# Altium PCB dongle.pcbdoc
Units mil, origin at the board's own origin, x right, y up, seen from the top; angles counter-clockwise.
Board outline 653.54 x 381.1 mil, 4 copper layers (Top Layer, Inner1, Inner2, Bottom Layer), stack 22.834 mil thick; 26 components, 21 nets, 115 pads, 44 vias.
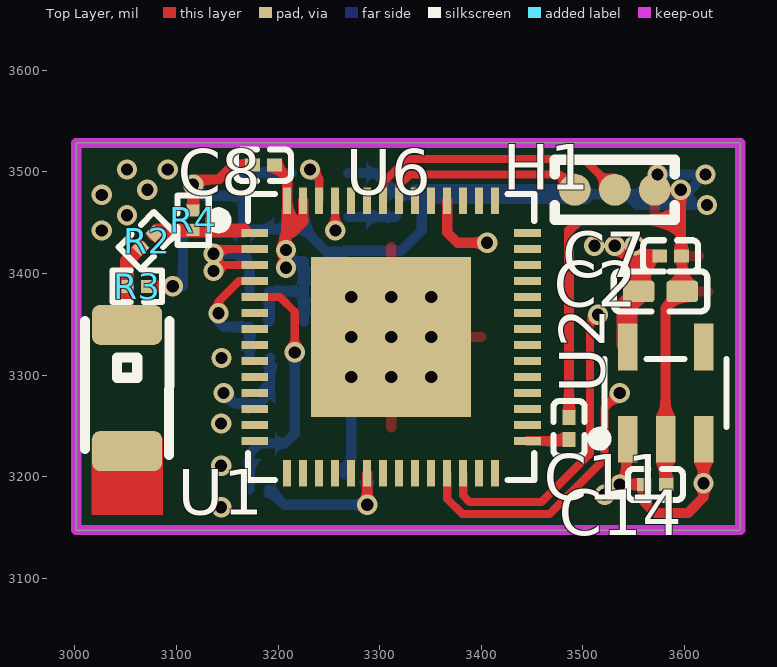
[diagram p0: Top Layer view]
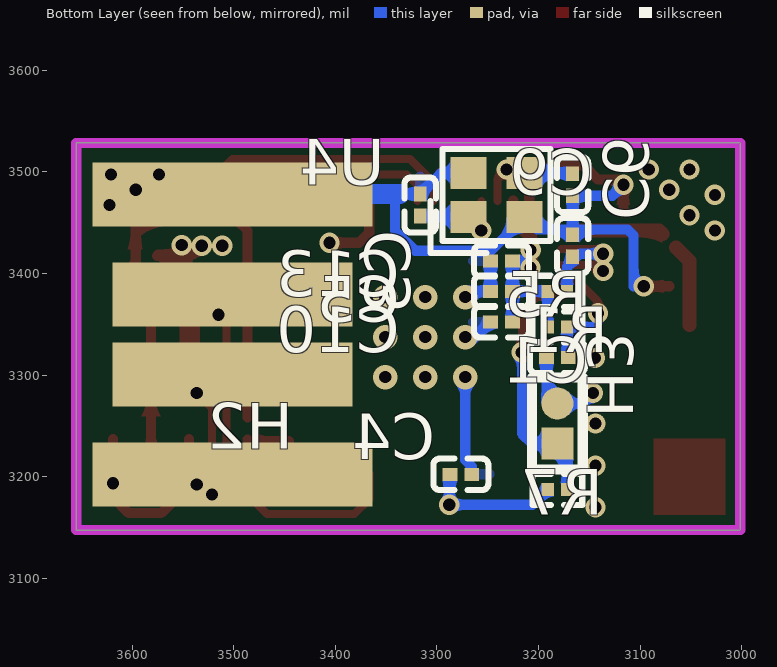
[diagram p1: Bottom Layer view, seen from below]
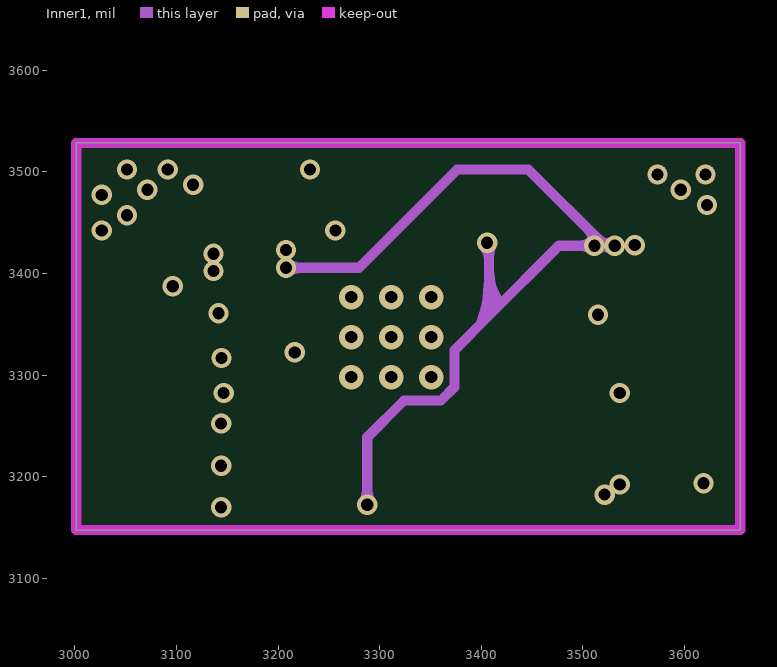
[diagram p2: Inner1]
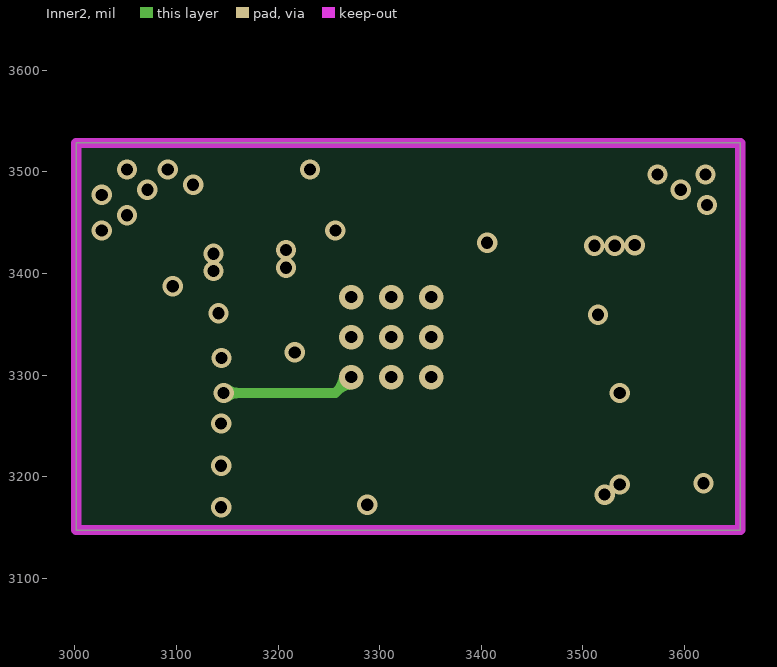
[diagram p3: Inner2]

## Layer stack, top to bottom
Top Solder Mask Layer: solder mask 0.394, Dk 0
Top Layer: signal copper 1.378
Dielectric1: surface 5.774, 7628 RC49% 8.6mil, Dk 0
Inner1: signal copper 1.378
Dielectric2: surface 5.774, 1.1mm H/HOZ Copper, Dk 0
Inner2: signal copper 1.378
Dielectric3: surface 5.774, 7628 RC49% 8.6mil, Dk 0
Bottom Layer: signal copper 1.378
Bottom Solder Mask Layer: solder mask 0.394, Dk 0

## Board outline
3001.38,3528.46 3654.92,3528.46 3654.92,3147.36 3001.38,3147.36

## Design rules (kind name [scope] priority, off if disabled: settings)
BoardOutlineClearance copperThickness1oz [All] p0: genericclearance=10 ignorepadtopadclearanceinfootprint=FALSE except(0: Arc-SplitContinuation Track-SplitContinuation SMDPad-SplitContinuation THPad-SplitContinuation Via-SplitContinuation Fill-SplitContinuation Poly-SplitContinuation Region-SplitContinuation Text-SplitContinuation)
BoardOutlineClearance copperThickness2oz [All] p0: genericclearance=10 ignorepadtopadclearanceinfootprint=FALSE except(0: Arc-SplitContinuation Track-SplitContinuation SMDPad-SplitContinuation THPad-SplitContinuation Via-SplitContinuation Fill-SplitContinuation Poly-SplitContinuation Region-SplitContinuation Text-SplitContinuation)
BoardOutlineClearance otherClearance [All] p0: genericclearance=10 ignorepadtopadclearanceinfootprint=FALSE except(0: Arc-SplitContinuation Track-SplitContinuation SMDPad-SplitContinuation THPad-SplitContinuation Via-SplitContinuation Fill-SplitContinuation Poly-SplitContinuation Region-SplitContinuation Text-SplitContinuation)
Clearance copperThickness1oz [All] p1: gap=7 ignorepadtopadclearanceinfootprint=FALSE
Clearance copperThickness2oz [All] p1: gap=7 ignorepadtopadclearanceinfootprint=FALSE
Clearance otherClearance [All] p1: gap=7 ignorepadtopadclearanceinfootprint=FALSE
DiffPairsRouting differentialPair [All] p1: maxuncoupledlength=10 minlimit=6 maxlimit=Infinity mostfreqgap=6 toplayer_minwidth=5 toplayer_prefwidth=10 toplayer_maxwidth=100 bottomlayer_minwidth=5 bottomlayer_prefwidth=10 bottomlayer_maxwidth=100 midlayer1_minwidth=5 midlayer1_prefwidth=10 midlayer1_maxwidth=100 midlayer2_minwidth=5 midlayer2_prefwidth=10 midlayer2_maxwidth=100
PasteMaskExpansion pasteMaskExpansion [All] p1: expansion=0
PlaneConnect innerPlane [All] p1: planeconnectstyle=Relief reliefexpansion=20 reliefentries=4 reliefconductorwidth=10 reliefairgap=10
PolygonConnect copperRegion [All] p1: connectstyle=Relief reliefentries=4 reliefconductorwidth=10 polygonreliefangle="90 Angle" airgapwidth=10
RoutingVias viaSize [All] p1: viastyle="Through Hole" holewidth=12.0078 minholewidth=11.811 maxholewidth=248.0314 width=12.0078 minwidth=11.811 maxwidth=248.0314
SolderMaskExpansion solderMaskExpansion [All] p1: useseparateexpansions=TRUE expansion=2 expansionbottom=2
Width copperThickness1oz [All] p1: maxlimit=100 minlimit=5 preferedwidth=10
Width copperThickness2oz [All] p1: maxlimit=100 minlimit=8 preferedwidth=10

## Components (designator, comment, footprint, x,y, rotation, side; value= is the part's Value field where it differs from the comment)
C1 "" C0201 3181.38,3317.36 r180 bottom
C2 "" C0402 3576.38,3382.36 r180 top
C3 "" C0201 3316.38,3467.36 r90 bottom
C4 "" C0201 3276.38,3202.36 r0 bottom
C5 "" C0201 3236.38,3382.36 r180 bottom
C6 "" C0201 3166.38,3427.36 r270 bottom
C7 "" C0201 3586.38,3417.36 r180 top
C8 "" C0201 3185.58,3506.56 r0 top
C9 "" C0201 3166.38,3487.36 r90 bottom
C10 "" C0201 3236.38,3352.36 r180 bottom
C11 "" C0201 3486.38,3247.36 r90 top
C13 "" C0201 3236.38,3412.36 r180 bottom
C14 "" C0201 3571.38,3192.36 r180 top
H1 "" HDR-TH_3P-P1.00-V-M-3 3531.38,3482.36 r0 top
H2 "" HDR-TH_4P-P2.54-V-M 3501.38,3202.36 r90 bottom
H3 "" HDR-TH_2P-P1.00-V-M 3181.38,3252.36 r90 bottom
R1 "" R0201 3181.38,3347.36 r0 bottom
R2 "" R0201 3071.38,3432.36 r225 top
R3 "" R0201 3061.38,3387.36 r180 top
R4 "" R0201 3116.38,3452.36 r270 top
R5 "" R0201 3181.38,3382.36 r0 bottom
R7 "" R0201 3181.38,3187.36 r180 bottom
U1 "" ANT-SMD_L3.2-W1.6 3051.38,3287.36 r270 top
U2 "" SOT-23-5_L3.0-W1.7-P0.95-LS2.8-BL 3581.38,3282.36 r0 top
U4 "" CRYSTAL-SMD_4P-L2.0-W1.6-BL 3241.38,3477.36 r180 bottom
U6 "" QFN-56_L7.0-W7.0-P0.40-TL-EP4.0 3311.38,3337.36 r0 top

## Footprints (in the part's own frame and the unit in brackets; to place one, negate y for a bottom-side part, rotate by r counter-clockwise, add the part's x,y. Pads: shape width x height; smd on the part's side, far side on the other; paste and mask are expansions set on the pad)
ANT-SMD_L3.2-W1.6 [mil]
  rrect40% 39.4x68.9 smd: 1(-62.1,0) 2(62.1,0)
  Top Layer region: 50,35 125,35 125,-35 50,-35
  silkscreen extent -66,-41 66,42
C0201 [mil]
  rect 14.51x12.76 smd: 1(-10.8,0) 2(10.8,0)
  silkscreen extent -27,-15 27,15
C0402 [mm]
  rrect30% 0.79x0.54 smd: 1(-0.545,0) 2(0.545,0)
  silkscreen extent -1.17,-0.5 1.17,0.5
CRYSTAL-SMD_4P-L2.0-W1.6-BL [mm]
  rect 0.9x0.8 smd: 1(-0.7,-0.55) 2(0.7,-0.55) 3(0.7,0.55) 4(-0.7,0.55)
  silkscreen extent -1.65,-1.45 1.35,1.15
HDR-TH_2P-P1.00-V-M [mm]
  rect 0.8x0.8 smd: 1(-0.5,0)
  round 0.8 smd: 2(0.5,0)
  silkscreen extent -1.15,-0.64 1.15,0.64
HDR-TH_3P-P1.00-V-M-3 [mm]
  round 0.8 smd: 1(-1,0) 2(0,0) 3(1,0)
  silkscreen extent -1.5,-0.75 1.5,0.75
HDR-TH_4P-P2.54-V-M [mm]
  rect 1.6x7 smd: 1(0,0) 4(7,0)
  rect 1.6x6 smd: 2(2.5,0) 3(4.5,0)
QFN-56_L7.0-W7.0-P0.40-TL-EP4.0 [mm]
  rect 0.665x0.2 smd: 1(-3.408,2.6) 2(-3.408,2.2) 3(-3.408,1.8) 4(-3.408,1.4) 5(-3.408,1) 6(-3.408,0.6) 7(-3.408,0.2) 8(-3.408,-0.2) 9(-3.408,-0.6) 10(-3.408,-1) 11(-3.408,-1.4) 12(-3.408,-1.8) 13(-3.408,-2.2) 14(-3.408,-2.6) 29(3.408,-2.6) 30(3.408,-2.2) 31(3.408,-1.8) 32(3.408,-1.4) 33(3.408,-1) 34(3.408,-0.6) 35(3.408,-0.2) 36(3.408,0.2) 37(3.408,0.6) 38(3.408,1) 39(3.408,1.4) 40(3.408,1.8) 41(3.408,2.2) 42(3.408,2.6)
  rect 0.2x0.665 smd: 15(-2.6,-3.408) 16(-2.2,-3.408) 17(-1.8,-3.408) 18(-1.4,-3.408) 19(-1,-3.408) 20(-0.6,-3.408) 21(-0.2,-3.408) 22(0.2,-3.408) 23(0.6,-3.408) 24(1,-3.408) 25(1.4,-3.408) 26(1.8,-3.408) 27(2.2,-3.408) 28(2.6,-3.408) 43(2.6,3.408) 44(2.2,3.408) 45(1.8,3.408) 46(1.4,3.408) 47(1,3.408) 48(0.6,3.408) 49(0.2,3.408) 50(-0.2,3.408) 51(-0.6,3.408) 52(-1,3.408) 53(-1.4,3.408) 54(-1.8,3.408) 55(-2.2,3.408) 56(-2.6,3.408)
  rect 4x4 smd: 57(0,0)
  silkscreen extent -4.64,-3.58 3.58,3.58
R0201 [mil]
  rect 11.93x12.76 smd: 1(-9.51,0) 2(9.51,0)
  silkscreen extent -24,-15 24,15
SOT-23-5_L3.0-W1.7-P0.95-LS2.8-BL [mm]
  rect 0.49x1.157 smd: 1(-0.95,-1.154) 2(0,-1.154) 3(0.95,-1.154)
  rect 0.49x1.175 smd: 4(0.95,1.154) 5(-0.95,1.154)
  silkscreen extent -1.8,-1.29 1.53,0.85

## Via types
v1: diameter 20, hole 12.01, Top Layer to Bottom Layer, 35 vias
v2: diameter 24, hole 12, Top Layer to Bottom Layer, 9 vias

## Nets (pads, with @x,y where several pads share a name; then routed paths per layer and width w, separated by ;. In a path a pad name is that pad's centre, name@x,y a point inside that pad or via, vN(x,y) a via of type N, cw(c..) or ccw(c..) an arc to the next point about the centre after c; other vN are vias at no path point)
$1N1: R2.2 R3.2 U1.1 | length 81.7
  Top Layer w13.8: U1.1 3051.38,3412.36 R2.2
$1N4: R2.1 R4.2 U6.1 | length 89.6
  Top Layer w13.8: R2.1 3081.38,3442.36 U6.1@3166.38,3442.36
$1N5: C6.2 R5.1 U6.2 U6.3 | length 178.3
  Top Layer w8: v1@3141.38,3402.36 3147.24,3408.22 U6.3 ; v1@3141.38,3412.36 3141.38,3422.36 3142.99,3423.97 U6.2
  Top Layer w10: v1(3136.38,3402.36) 3141.38,3402.36 3136.38,3407.36 3141.38,3412.36 3136.38,3417.36 v1(3136.38,3419.48)
  Bottom Layer w10: v1(3136.38,3419.48) 3159.26,3419.48 3171.87,3406.87 R5.1
ESP_EN: C1.2 R1.1 U6.4 | length 127.3
  Top Layer w8: v1(3141.38,3360.84) 3141.38,3372.36 3161.5,3392.49 U6.4
  Bottom Layer w10: v1(3141.38,3360.84) 3141.38,3352.36 3146.38,3347.36 R1.1 3171.87,3318.65 C1.2
GND: C1.1 C2.1 C3.2 C4.1 C5.1 C6.1 C7.1 C8.1 C9.1 C10.1 C11.2 C13.1 C14.1 H1.3 H2.4 H3.2 R3.1 R4.1 U2.2 U4.2 U4.4 U6.57 | length 2108.4
  Top Layer w10: R3.1 v1(3096.38,3387.36) ; R4.1 v1(3116.38,3487.36) 3121.38,3492.36 3141.38,3492.36 3155.58,3506.56 C8.1 ; C11.2 3486.38,3442.36 3496.38,3452.36 3596.38,3452.36 ; C14.1@3580.43,3193.52 3580.43,3234.4 U2.2@3581.59,3235.56 ; U2.2 3581.38,3365.9 C2.1 3597.84,3409.62 3596.38,3411.08 3596.38,3452.36 ; v1(3596.38,3482.36) 3596.38,3452.36
  Inner2 w10: v1(3146.38,3282.36) 3256.39,3282.36 v2(3272.01,3297.99)
  Bottom Layer w10: 3106.38,3387.36 3106.38,3437.36 3112.18,3443.16 C6.1@3166.38,3443.16 ; v1(3116.38,3487.36) 3127.18,3476.56 C9.1 C6.1@3166.38,3443.16 ; v1(3146.38,3282.36) 3156.69,3272.05 H3.2 3192.18,3282.84 C1.1 ; C10.1 3262.17,3337.36 v2(3272.02,3337.36) ; C13.1 C5.1 3266.39,3382.36 v2(3272.02,3376.72) ; C4.1 3265.58,3209.92 3272.01,3216.36 v2(3272.01,3297.99) ; U4.4 3295.53,3499.01 C3.2 3336.65,3478.16 3341.38,3473.43 3341.38,3442.36 3321.38,3422.36 3266.05,3422.36 3265.07,3421.38 3247.69,3421.38 3213.82,3455.24 U4.2 3201.27,3443.16 C6.1@3166.38,3443.16 ; H2.4 H2.4@3542.83,3477.95 ; v1(3596.38,3482.36) H2.4@3600.79,3477.95 ; v1(3622.19,3467.36) H2.4@3611.38,3467.36 ; H2.4@3542.83,3477.95 3553.42,3467.36 H2.4@3611.38,3467.36 ; H2.4@3542.83,3477.95 H2.4@3554.01,3477.95 ; H2.4@3554.01,3477.95 v1(3573.42,3497.36) v1(3620.75,3497.36) 3601.34,3477.95 H2.4@3600.79,3477.95 ; H2.4@3554.01,3477.95 H2.4@3600.79,3477.95 ; H2.4@3600.79,3477.95 H2.4@3611.38,3467.36
  Bottom Layer w20: 3336.65,3478.16 3501.17,3478.16 H2.4
  other v1: 3143.96,3169.83 3143.96,3210.66 3143.96,3252.36 3144.4,3316.81 3026.38,3442.36 3051.38,3457.36 3026.38,3477.36 3071.38,3482.36 3051.38,3502.36 3091.38,3502.36
  other v2: 3311.4,3298.01 3350.75,3297.99 3311.38,3337.36 3350.75,3337.36 3311.38,3376.72 3350.75,3376.72
GPIO0: H3.1 R7.2 U6.5 | length 253.4
  Top Layer w8: U6.5 3202,3376.74 3216.38,3362.36 v1(3216.38,3322.36)
  Bottom Layer w10: R7.2 3171.87,3223.16 H3.1 3206.69,3232.68 3216.38,3242.36 v1(3216.38,3322.36)
RX: H1.2 U6.50 | length 268
  Top Layer w8: U6.50 3303.5,3489.57 3326.6,3512.66 3501.08,3512.66 H1.2
SPICLK: U6.33
SPICS0: U6.32
SPID: U6.35
SPIHD: U6.30
SPIQ: U6.34
SPIWP: U6.31
TX: H1.1 U6.49 | length 198.7
  Top Layer w8: U6.49 3319.25,3486.91 3329.7,3497.36 3477.01,3497.36 H1.1
USB_DN: H2.2 U6.25 | length 279.9
  Top Layer w8: U6.25 3366.5,3178.03 3381.38,3163.16 3467.18,3163.16 3521.38,3217.36 3521.38,3267.36 v1(3536.38,3282.36)
USB_DP: H2.3 U6.26 | length 308.6
  Top Layer w8: U6.26 3382.24,3181.49 3388.56,3175.18 3459.19,3175.18 3506.94,3222.92 3506.94,3351.38 v1(3514.94,3359.38)
VBUS: C14.2 H2.1 U2.1 U2.3 | length 215.6
  Top Layer w10: U2.1 3543.98,3214.96 3542.64,3213.62 3542.64,3198.62 v1(3536.38,3192.36) C14.2 3560.58,3174.96 3571.38,3164.16 3603.18,3164.16 3618.78,3179.76 v1(3618.78,3193.62) U2.3
  other v1: 3521.38,3182.36
VDD3V3: C2.2 C4.2 C5.2 C7.2 C8.2 C10.2 C13.2 R1.2 R5.2 R7.1 U2.5 U6.20 U6.46 U6.55 U6.56 | length 1539.9
  Top Layer w10: C8.2 3209.02,3493.91 U6.56 3209.02,3439.78 ; v1(3207.79,3405.58) 3206.38,3406.99 3206.38,3437.14 3209.02,3439.78 ; U6.55 3224.76,3450.74 3213.8,3439.78 3209.02,3439.78 ; v1(3287.76,3172.36) U6.20 ; U6.46 3366.5,3440.33 3376.63,3430.2 v1(3405.72,3430.2) ; v1(3531.38,3427.36) 3540.18,3418.55 3552.49,3418.55 3574.38,3418.55 C7.2
  Top Layer w20: U2.5@3543.34,3330.5 3543.34,3368.73 C2.2@3555.29,3380.68 ; v1@3552.49,3418.55 3554.92,3416.13 C2.2
  Inner1 w10: v1(3207.79,3405.58) 3279.6,3405.58 3376.38,3502.36 3446.38,3502.36 v1@3521.38,3427.36 ; v1(3287.76,3172.36) 3287.76,3238.74 3324.02,3275 3360.27,3275 3373.74,3288.46 3373.74,3324.72 3407.62,3358.6 ; v1(3405.72,3430.2) 3407.62,3428.3 3407.62,3358.6 ; v1(3531.38,3427.36) v1@3521.38,3427.36 ; 3407.62,3358.6 3476.38,3427.36 v1(3511.35,3427.36) v1@3521.38,3427.36
  Bottom Layer w10: R7.1 3205.89,3172.36 v1(3287.76,3172.36) 3287.76,3201.78 C4.2 ; R1.2@3190.89,3352.36 3191.38,3352.85 3191.38,3382.36 C5.2 ; v1(3207.79,3405.58) 3214.57,3412.36 C13.2 C5.2 ; C10.2 C5.2
  other v1: 3207.73,3423.19 3551.06,3427.93
VDD_SPI: C11.1 U6.29 | length 41.5
  Top Layer w10: U6.29 3484.82,3235.01 C11.1
XTAL_N: C3.1 U4.1 U6.53 | length 77
  Top Layer w8: U6.53 3256.26,3442.47 v1(3256.38,3442.36)
  Bottom Layer w10: U4.1 3315.53,3455.71 C3.1
XTAL_P: C9.2 U4.3 U6.54 | length 82.4
  Top Layer w8: v1(3231.38,3502.36) 3240.51,3493.22 U6.54
  Bottom Layer w10: C9.2 3167.23,3499.01 U4.3
pads on no net: U1.2 U2.4 U6.6 U6.7 U6.8 U6.9 U6.10 U6.11 U6.12 U6.13 U6.14 U6.15 U6.16 U6.17 U6.18 U6.19 U6.21 U6.22 U6.23 U6.24 U6.27 U6.28 U6.36 U6.37 U6.38 U6.39 U6.40 U6.41 U6.42 U6.43 U6.44 U6.45 U6.47 U6.48 U6.51 U6.52

## Polygon pours and split planes (outlines as drawn)
GND on Bottom Layer (solid, remove dead copper, pour order 10): 3361.1,3526.89 3361.1,3147.36 3136.38,3147.36 3136.38,3380.55 3001.38,3377.36 3001.38,3528.46 3359.52,3528.46
GND on Inner2 (solid, remove dead copper): 3001.99,3533.46 3654.92,3533.46 3654.92,3152.36 3136.38,3154.2 3136.38,3372.39 3001.99,3373.08
GND on Top Layer (solid, remove dead copper, pour order 2): 3000,3528.46 3645.28,3528.46 3651.38,3522.36 3651.38,3152.36 3646.38,3147.36 3134.39,3147.36 3134.39,3352.36 3154.39,3372.36 3206.38,3372.36 3210.47,3376.45 3210.47,3416.49 3000,3416.49
VDD3V3 on Bottom Layer (solid, remove dead copper, pour order 6): 3106.29,3822.28 3106.29,3827.28 3106.38,3827.36 3106.38,3822.36
VDD3V3 on Inner1 (solid, remove dead copper): 3576.1,3452.36 3576.1,3254.5 3478.95,3157.36 3256.38,3157.36 3173.23,3240.51 3173.23,3407.08 3201.86,3435.71 3296.86,3435.71 3373.81,3512.66 3515.79,3512.66
VDD3V3 on Top Layer (solid, remove dead copper, pour order 0): 3556.38,3347.36 3536.38,3347.36 3530.37,3353.37 3530.37,3382.36 3496.38,3416.35 3496.38,3432.36 3503.85,3439.84 3559.33,3439.84 3569.29,3429.87 3569.29,3373.5 3556.38,3360.59

## Keep-outs
Board Outline Layer:
  the board outline again, w10

## Other copper
Top Layer:
  region net VDD3V3: 3544.92,3416.13 3564.92,3416.13 ccw(c3679.35,3416.13) 3567.28,3392.99 3542.55,3392.99 ccw(c3430.49,3416.13)
  region net GND: 3588.98,3366.43 3577.84,3369.44 ccw(c3553.92,3393.36) 3582.28,3374.92 3604.89,3371.73 ccw(c3604.89,3345.21)
  region net GND: 3592.84,3407.99 3602.84,3407.99 ccw(c3621.8,3407.99) 3610.2,3392.99 3585.47,3392.99 ccw(c3573.88,3407.99)
  region net $1N4: 3098.51,3449.26 3099.09,3435.46 ccw(c3099.09,3390.94) 3078.39,3430.36 3077.81,3447.81 ccw(c3077.81,3596.68)
  region net GND: 3091.86,3392.36 3091.86,3382.36 ccw(c3091.86,3300.03) 3076.86,3380.98 3076.86,3393.74 ccw(c3091.86,3474.69)
  region net GND: 3111.38,3482.84 3121.38,3482.84 ccw(c3203.71,3482.84) 3122.76,3467.84 3110,3467.84 ccw(c3029.05,3482.84)
  region net VDD3V3: 3553.33,3413.55 3553.33,3423.55 ccw(c3553.33,4038.07) 3568.33,3423.74 3568.33,3410.98 ccw(c3553.33,3368.54)
  region net GND: 3591.38,3438.74 3601.38,3438.74 ccw(c3639.76,3438.74) 3604.43,3423.74 3589.93,3423.74 ccw(c3513.2,3438.74)
  region net VDD3V3: 3210.96,3499.05 3203.01,3492.86 ccw(c3184.22,3474.06) 3189.13,3500.18 3203.63,3512.94 ccw(c3229.75,3517.84)
  region net GND: 3155.58,3501.56 3155.58,3511.56 ccw(c3155.58,3564.04) 3167.53,3512.94 3167.53,3500.18 ccw(c3155.58,3449.08)
  region net GND: 3481.38,3280.41 3491.38,3280.41 ccw(c3573.71,3280.41) 3492.76,3265.41 3480,3265.41 ccw(c3399.05,3280.41)
  region net VDD_SPI: 3465,3230.01 3465,3240.01 ccw(c3465,3271.46) 3480,3243.81 3480,3229.31 ccw(c3465,3068.37)
  region net VBUS: 3538.33,3187.36 3538.33,3197.36 ccw(c3538.33,3279.69) 3553.33,3198.74 3553.33,3185.98 ccw(c3538.33,3105.03)
  region net VBUS: 3565.58,3174.96 3555.58,3174.96 ccw(c3527.49,3174.96) 3553.33,3185.98 3567.83,3185.98 ccw(c3593.67,3174.96)
  region net GND: 3575.43,3213.74 3585.43,3213.74 ccw(c3615.59,3213.74) 3589.43,3198.74 3574.93,3198.74 ccw(c3354.2,3213.74)
  region net GND: 3576.38,3274.72 3586.38,3274.72 ccw(c3612.92,3274.72) 3591.02,3259.72 3571.73,3259.72 ccw(c3549.84,3274.72)
  region net GND: 3585.43,3199.16 3575.43,3199.16 ccw(c3543.2,3199.16) 3571.73,3214.16 3591.02,3214.16 ccw(c3608.36,3199.16)
  region net VBUS: 3623.78,3199.16 3613.78,3199.16 ccw(c3587.24,3199.16) 3609.13,3214.16 3628.42,3214.16 ccw(c3650.32,3199.16)
  region net VDD3V3: 3533.34,3368.73 3553.34,3368.73 ccw(c4105.76,3368.73) 3553.62,3350.91 3534.33,3350.91 ccw(c3374.46,3350.91)
  region net TX: 3474.19,3494.53 3479.84,3500.19 3481.18,3499.23 3482.81,3498.59 3484.65,3498.22 3486.57,3498.05 3490.25,3498.05 3493,3498.08 3476.29,3481.38 3476.32,3484.13 3476.32,3487.81 3476.15,3489.73 3475.78,3491.56 3475.15,3493.2
  region net RX: 3513.39,3494.7 3519.05,3500.35 3520.41,3499.37 3522.07,3498.71 3523.92,3498.31 3525.87,3498.11 3529.59,3498.07 3532.37,3498.08 3515.66,3481.38 3515.68,3484.16 3515.63,3487.88 3515.44,3489.82 3515.04,3491.68 3514.38,3493.34
  region net XTAL_N: 3252.26,3455.89 3260.26,3456.06 3260.57,3454.59 3261.37,3452.72 3262.5,3450.76 3263.8,3449.06 3248.8,3448.89 3250.07,3450.62 3251.18,3452.58 3251.97,3454.45
  region net XTAL_P: 3243.34,3496.05 3237.68,3490.4 3236.62,3491.03 3234.9,3491.64 3232.83,3492.12 3230.75,3492.38 3241.36,3502.99 3241.62,3500.91 3242.1,3498.84 3242.71,3497.11
  region net USB_DP: 3509.76,3348.55 3504.11,3354.2 3504.39,3354.91 3504.62,3356.27 3504.96,3360 3515.56,3349.4 3511.83,3349.06 3510.47,3348.83
  region net USB_DN: 3529.58,3269.9 3523.92,3275.56 3524.74,3276.8 3525.5,3278.69 3526.09,3280.86 3526.4,3282.99 3537,3272.38 3534.88,3272.07 3532.7,3271.48 3530.82,3270.72
  region net $1N5: 3145.91,3427.97 3152.91,3419.97 3150.65,3419.67 3148.52,3418.87 3146.83,3417.74 3146.25,3417.11 3145.91,3416.45 3138.91,3429.15 3142.78,3428.34
  region net VDD3V3: 3282.76,3185.97 3292.76,3185.97 3292.98,3184.2 3293.54,3182.22 3294.34,3180.37 3295.26,3178.97 3280.26,3178.97 3281.18,3180.37 3281.98,3182.22 3282.55,3184.2
  region net GND: 3082.76,3382.36 3082.76,3392.36 3084.54,3392.57 3086.51,3393.14 3088.36,3393.94 3089.76,3394.86 3089.76,3379.86 3088.36,3380.78 3086.51,3381.58 3084.54,3382.15
  region net VDD3V3: 3201.38,3418.07 3211.38,3420.19 3211.63,3418.31 3212.28,3416.3 3213.21,3414.48 3214.28,3413.19 3199.43,3411.07 3200.15,3412.51 3200.77,3414.37 3201.21,3416.34
  region net GND: 3121.38,3473.75 3111.38,3473.75 3111.16,3475.52 3110.6,3477.5 3109.8,3479.35 3108.88,3480.75 3123.88,3480.75 3122.96,3479.35 3122.16,3477.5 3121.59,3475.52
  region net GND: 3125.36,3497.36 3133.06,3487.36 3130.67,3487.15 3128.49,3486.58 3126.84,3485.78 3126.32,3485.33 3126.06,3484.86 3118.36,3497.16 3119.64,3497.08 3121.32,3497.16
  region net VDD3V3: 3543.72,3422.09 3536.65,3415.02 3535.54,3415.82 3534.01,3416.55 3532.32,3417.11 3530.75,3417.38 3541.36,3427.99 3541.63,3426.42 3542.18,3424.73 3542.92,3423.19
  region net GND: 3601.38,3468.75 3591.38,3468.75 3591.16,3470.52 3590.6,3472.5 3589.8,3474.35 3588.88,3475.75 3603.88,3475.75 3602.96,3474.35 3602.16,3472.5 3601.59,3470.52
  region net VBUS: 3549.99,3197.36 3549.99,3187.36 3548.22,3187.15 3546.24,3186.58 3544.39,3185.78 3542.99,3184.86 3542.99,3199.86 3544.39,3198.94 3546.24,3198.14 3548.22,3197.57
  region net VBUS: 3537.64,3209.28 3547.64,3199.82 3547.43,3197.74 3546.98,3195.8 3546.54,3194.12 3546.37,3192.82 3535.12,3202.28 3535.59,3202.49 3536.05,3202.97 3536.85,3204.59 3537.42,3206.8
  region net VDD3V3: 3201.38,3435.74 3211.38,3437.14 3211.63,3435.5 3212.28,3433.69 3213.21,3432.01 3214.27,3430.76 3199.4,3428.74 3200.13,3430.17 3200.76,3432.04 3201.21,3434
  region net VDD3V3: 3211.38,3408.63 3201.38,3410.65 3201.21,3412.39 3200.76,3414.35 3200.13,3416.21 3199.4,3417.65 3214.27,3415.63 3213.21,3414.33 3212.28,3412.51 3211.63,3410.5
  region net VDD3V3: 3567.86,3423.55 3553.68,3413.55 3552.64,3413.75 3551.63,3414.29 3550.65,3415.06 3549.73,3415.96 3548.05,3417.77 3547.32,3418.49 3546.68,3418.94 3560.86,3425.94 3560.94,3425.5 3561.33,3425.07 3562.88,3424.3 3565.17,3423.76
  region net VDD3V3: 3548.44,3413.55 3540.18,3423.55 3540.71,3423.76 3541.1,3424.3 3541.3,3425.07 3541.26,3425.94 3555.44,3418.94 3554.79,3418.49 3554.07,3417.77 3552.39,3415.96 3551.46,3415.06 3550.49,3414.29 3549.48,3413.75
  region net VBUS: 3613.78,3207.24 3623.78,3207.24 3623.99,3205.47 3624.56,3203.49 3625.36,3201.64 3626.28,3200.24 3611.28,3200.24 3612.2,3201.64 3613,3203.49 3613.56,3205.47
  region net VBUS: 3623.78,3180.01 3613.78,3180.01 3613.56,3181.78 3613,3183.76 3612.2,3185.61 3611.28,3187.01 3626.28,3187.01 3625.36,3185.61 3624.56,3183.76 3623.99,3181.78
  region net $1N5: 3144.41,3411.05 3149.16,3404.48 3148.41,3403.51 3147.43,3401.95 3145.49,3398.25 3139.32,3411.92 3142.58,3411.09 3143.78,3410.94
  region net VDD3V3: 3392.1,3425.2 3392.1,3435.2 3393.88,3435.41 3395.85,3435.98 3397.71,3436.78 3399.1,3437.7 3399.1,3422.7 3397.71,3423.62 3395.85,3424.42 3393.88,3424.98
  region net ESP_EN: 3137.38,3372.36 3145.38,3372.36 3145.68,3371.62 3146.47,3370.43 3148.88,3367.46 3133.88,3367.46 3136.28,3370.43 3137.08,3371.62
  region net GPIO0: 3212.38,3335.97 3220.38,3335.97 3220.68,3334.52 3221.47,3332.65 3222.59,3330.69 3223.88,3328.97 3208.88,3328.97 3210.16,3330.69 3211.28,3332.65 3212.08,3334.52
  region net VDD3V3: 3204.02,3471.51 3202.93,3440.76 3211.38,3406.99 3212.89,3434.87 3221.23,3454.28 cw(c3238.24,3471.51) 3214.02,3471.51
  region net VDD3V3: 3564.92,3382.36 cw(c3621.06,3382.36) 3574.38,3413.55 3552.49,3418.55 3540.18,3413.55 cw(c3439.79,3382.36) 3544.92,3382.36
  region net GND: 3561.38,3457.36 ccw(c3561.38,3507.36) 3591.38,3467.36 3596.38,3452.36 3591.38,3437.36 ccw(c3561.38,3397.36) 3561.38,3447.36
Inner1:
  region net VDD3V3: 3282.76,3185.97 3292.76,3185.97 3292.98,3184.2 3293.54,3182.22 3294.34,3180.37 3295.26,3178.97 3280.26,3178.97 3281.18,3180.37 3281.98,3182.22 3282.55,3184.2
  region net VDD3V3: 3221.4,3410.58 3221.4,3400.58 3219.63,3400.37 3217.65,3399.8 3215.8,3399 3214.4,3398.08 3214.4,3413.08 3215.8,3412.16 3217.65,3411.36 3219.63,3410.8
  region net VDD3V3: 3517.84,3423.82 3517.9,3437.91 3519.85,3436.27 3521.83,3435.09 3523.53,3434.53 3524.17,3434.53 3524.63,3434.74 3524.76,3419.86 3523.48,3420.62 3521.67,3421.42 3519.67,3422.43 3518.72,3423.07
  region net VDD3V3: 3500.81,3440.86 3515.41,3440.4 3516.09,3439.6 3516.65,3438.71 3517.52,3436.84 3518.2,3435.14 3518.87,3433.95 3503.99,3434.13 3504.19,3434.58 3504.19,3435.23 3503.63,3436.93 3502.46,3438.91
  region net VDD3V3: 3497.73,3422.36 3497.73,3432.36 3499.5,3432.57 3501.48,3433.14 3503.33,3433.94 3504.73,3434.86 3504.73,3419.86 3503.33,3420.78 3501.48,3421.58 3499.5,3422.15
  region net VDD3V3: 3521.38,3432.36 3521.38,3422.36 3520.86,3422.15 3520.04,3421.58 3517.96,3419.86 3517.96,3434.86 3520.04,3433.14 3520.86,3432.57
  region net VDD3V3: 3412.62,3418.13 3402.62,3415.28 3402.36,3417.2 3401.68,3419.22 3400.72,3421.03 3399.61,3422.28 3414.34,3425.13 3413.71,3423.71 3413.16,3421.85 3412.77,3419.88
  region net VDD3V3: 3402.62,3390.67 cw(c3301.91,3390.67) 3395.55,3353.6 3407.62,3358.6 3419.69,3377.75 cw(c3453.33,3400.67) 3412.62,3400.67
Inner2:
  region net GND: 3264,3282.9 3256.93,3289.97 3257.96,3291.49 3258.92,3293.73 3259.66,3296.29 3260.04,3298.74 3272.76,3286.01 3270.31,3285.63 3267.76,3284.89 3265.52,3283.93
  region net GND: 3159.99,3287.36 3159.99,3277.36 3158.22,3277.15 3156.24,3276.58 3154.39,3275.78 3152.99,3274.86 3152.99,3289.86 3154.39,3288.94 3156.24,3288.14 3158.22,3287.57
Bottom Layer:
  region net GND: 3236.84,3439.3 3227.33,3434.66 ccw(c3211.42,3413.45) 3211.42,3439.96 3231.53,3455.2 ccw(c3258.05,3455.2)
  region net GND: 3181.1,3438.16 3181.1,3448.16 ccw(c3181.1,3466.91) 3196.1,3455.66 3196.1,3439.96 ccw(c3196.1,3376.63)
  region net XTAL_P: 3181.1,3494.01 3181.1,3504.01 ccw(c3181.1,3522.76) 3196.1,3511.51 3196.1,3486.51 ccw(c3181.1,3475.26)
  region net GND: 3295.53,3504.01 3295.53,3494.01 ccw(c3295.53,3485.01) 3286.65,3486.51 3286.65,3511.51 ccw(c3295.53,3513.01)
  region net XTAL_N: 3301.65,3460.71 3301.65,3450.71 ccw(c3301.65,3431.96) 3286.65,3443.21 3286.65,3468.21 ccw(c3301.65,3479.46)
  region net ESP_EN: 3166.87,3338.74 3176.87,3338.74 ccw(c3294.23,3338.74) 3177.83,3323.74 3163.33,3323.74 ccw(c3133.34,3338.74)
  region net GND: 3197.18,3295.98 3187.18,3295.98 ccw(c3136.11,3295.98) 3184.93,3310.98 3199.43,3310.98 ccw(c3248.25,3295.98)
  region net GND: 3302.67,3484.79 3308.87,3492.74 ccw(c3327.66,3511.53) 3322.76,3485.41 3310,3470.91 ccw(c3283.88,3466)
  region net GND: 3336.65,3483.16 3336.65,3473.16 ccw(c3336.65,3429.2) 3322.76,3470.91 3322.76,3485.41 ccw(c3336.65,3527.12)
  region net XTAL_N: 3295,3450.71 3295,3460.71 ccw(c3295,3498.52) 3310,3463.81 3310,3449.31 ccw(c3295,3369.8)
  region net VDD3V3: 3292.76,3180.98 3282.76,3180.98 ccw(c3241.7,3180.98) 3279.93,3195.98 3294.43,3195.98 ccw(c3361.06,3180.98)
  region net VDD3V3: 3220.58,3403.74 3230.58,3403.74 ccw(c3281.65,3403.74) 3232.83,3388.74 3218.33,3388.74 ccw(c3169.51,3403.74)
  region net VDD3V3: 3230.58,3360.98 3220.58,3360.98 ccw(c3169.51,3360.98) 3218.33,3375.98 3232.83,3375.98 ccw(c3281.65,3360.98)
  region net VDD3V3: 3203.33,3377.36 3203.33,3387.36 ccw(c3203.33,3469.69) 3218.33,3388.74 3218.33,3375.98 ccw(c3203.33,3295.03)
  region net GND: 3242.18,3403.74 3252.18,3403.74 ccw(c3303.25,3403.74) 3254.43,3388.74 3239.93,3388.74 ccw(c3191.11,3403.74)
  region net GND: 3266.39,3387.36 3266.39,3377.36 ccw(c3266.39,3324.79) 3254.43,3375.98 3254.43,3388.74 ccw(c3266.39,3439.93)
  region net $1N5: 3175.4,3410.41 3168.33,3403.33 ccw(c3146.06,3381.06) 3160,3409.31 3172.76,3423.66 ccw(c3207.26,3423.66)
  region net GND: 3145,3438.16 3145,3448.16 ccw(c3160,3487.73) 3160,3445.41 3160,3430.91 ccw(c3145,3419.02)
  region net GND: 3161.38,3460.41 3171.38,3460.41 ccw(c3253.71,3460.41) 3172.76,3445.41 3160,3445.41 ccw(c3079.05,3460.41)
  region net GND: 3187.76,3448.16 3187.76,3438.16 ccw(c3187.76,3419.02) 3172.76,3430.91 3172.76,3445.41 ccw(c3172.76,3487.73)
  region net XTAL_P: 3187.76,3504.01 3187.76,3494.01 ccw(c3187.76,3456.2) 3172.76,3490.91 3172.76,3505.41 ccw(c3187.76,3584.92)
  region net GND: 3171.38,3454.31 3161.38,3454.31 ccw(c3079.05,3454.31) 3160,3469.31 3172.76,3469.31 ccw(c3253.71,3454.31)
  region net GND: 3145,3471.56 3145,3481.56 ccw(c3145,3532.63) 3160,3483.81 3160,3469.31 ccw(c3145,3420.49)
  region net VDD3V3: 3220.58,3373.74 3230.58,3373.74 ccw(c3281.65,3373.74) 3232.83,3358.74 3218.33,3358.74 ccw(c3169.51,3373.74)
  region net GND: 3261.76,3344.85 3253.81,3338.66 ccw(c3235.02,3319.86) 3239.93,3345.98 3254.43,3358.74 ccw(c3280.55,3363.64)
  region net VDD3V3: 3230.58,3390.98 3220.58,3390.98 ccw(c3169.51,3390.98) 3218.33,3405.98 3232.83,3405.98 ccw(c3281.65,3390.98)
  region net VDD3V3: 3214.57,3407.36 3214.57,3417.36 ccw(c3214.57,3423.18) 3218.33,3418.74 3218.33,3405.98 ccw(c3214.57,3401.54)
  region net GND: 3252.18,3390.98 3242.18,3390.98 ccw(c3191.11,3390.98) 3239.93,3405.98 3254.43,3405.98 ccw(c3303.25,3390.98)
  region net VDD3V3: 3186.38,3368.74 3196.38,3368.74 ccw(c3432.46,3368.74) 3196.86,3353.74 3184.92,3353.74 ccw(c3108.44,3368.74)
  region net ESP_EN: 3176.87,3325.98 3166.87,3325.98 ccw(c3050.04,3325.98) 3165.9,3340.98 3177.84,3340.98 ccw(c3293.69,3325.98)
  region net ESP_EN: 3150.9,3342.36 3150.9,3352.36 ccw(c3150.9,3434.69) 3165.9,3353.74 3165.9,3340.98 ccw(c3150.9,3260.03)
  region net GPIO0: 3166.87,3208.74 3176.87,3208.74 ccw(c3293.69,3208.74) 3177.84,3193.74 3165.9,3193.74 ccw(c3050.04,3208.74)
  region net VDD3V3: 3204.82,3180.49 3198.16,3173.01 ccw(c3175.51,3150.36) 3184.92,3180.98 3196.86,3193.74 ccw(c3227.47,3203.14)
  region net VDD3V3: 3196.38,3360.98 3186.38,3360.98 ccw(c3108.44,3360.98) 3184.92,3375.98 3196.86,3375.98 ccw(c3432.46,3360.98)
  region net VDD3V3: 3211.86,3387.36 3211.86,3377.36 ccw(c3211.86,3295.03) 3196.86,3375.98 3196.86,3388.74 ccw(c3211.86,3469.69)
  region net $1N5: 3166.87,3403.74 3176.87,3403.74 ccw(c3293.69,3403.74) 3177.84,3388.74 3165.9,3388.74 ccw(c3050.04,3403.74)
  region net GND: 3159.94,3267.05 3159.94,3277.05 3161.6,3277.27 3163.25,3277.87 3164.85,3278.75 3166.37,3279.81 3169.04,3282.07 3170.96,3283.86 3170.96,3260.23 3169.04,3262.02 3166.37,3264.28 3164.85,3265.34 3163.25,3266.22 3161.6,3266.82
  region net GND: 3187.18,3298.78 3197.18,3282.84 3197.12,3271.53 3180.28,3287.75 3181.32,3288.1 3182.45,3288.93 3183.6,3290.16 3184.7,3291.68 3185.68,3293.4 3186.46,3295.22 3186.99,3297.05
  region net GPIO0: 3176.87,3201.93 3166.87,3201.93 ccw(c3075.38,3201.93) 3165.63,3216.93 3184.37,3216.93 ccw(c3195.62,3201.93)
  region net GPIO0: 3206.69,3237.68 3206.69,3227.68 ccw(c3206.69,3217.82) 3197.13,3220.18 3197.13,3245.18 ccw(c3206.69,3247.53)
  region net GND: 3256.75,3335.72 3256.34,3350.27 3257.43,3349.31 3258.62,3348.48 3259.87,3347.79 3261.13,3347.27 3262.33,3346.94 3263.44,3346.8 3264.4,3346.88 3265.15,3347.2 3262.71,3329.8 3260.22,3332.36
  region net GND: 3252.11,3377.36 3260.84,3387.36 3264.98,3387.68 3269.24,3388.4 3260.51,3373.33 3260.13,3374.08 3259.46,3374.81 3258.55,3375.49 3257.44,3376.1 3254.86,3377.01 3253.49,3377.27
  region net GND: 3277.01,3281.65 3267.01,3281.65 3266.67,3283.46 3265.76,3285.72 3264.48,3288.05 3263.01,3290.05 3281.01,3290.05 3279.54,3288.05 3278.26,3285.72 3277.36,3283.46
  region net $1N5: 3149.99,3424.48 3149.99,3414.48 3148.22,3414.26 3146.24,3413.69 3144.39,3412.89 3142.99,3411.98 3142.99,3426.98 3144.39,3426.06 3146.24,3425.26 3148.22,3424.69
  region net VDD3V3: 3274.15,3167.36 3274.15,3177.36 3275.92,3177.57 3277.9,3178.14 3279.75,3178.94 3281.15,3179.86 3281.15,3164.86 3279.75,3165.78 3277.9,3166.58 3275.92,3167.15
  region net VDD3V3: 3282.76,3185.97 3292.76,3185.97 3292.98,3184.2 3293.54,3182.22 3294.34,3180.37 3295.26,3178.97 3280.26,3178.97 3281.18,3180.37 3281.98,3182.22 3282.55,3184.2
  region net GND: 3101.38,3404 3111.38,3389.36 3111.14,3388.32 3110.52,3387.32 3109.62,3386.35 3108.56,3385.42 3106.43,3383.75 3105.58,3383.02 3105.04,3382.36 3099.05,3397 3099.49,3397.05 3099.91,3397.43 3100.65,3398.99 3101.18,3401.3
  region net VDD3V3: 3214.57,3417.36 3224.76,3407.36 3222.24,3407.14 3220.02,3406.57 3218.41,3405.77 3217.95,3405.31 3217.76,3404.84 3207.56,3415.58 3208.87,3415.87 3210.56,3416.48 3212.49,3417.09
  region net GND: 3129.54,3481.27 3122.47,3474.2 3121.06,3475.3 3119.27,3476.3 3117.39,3477.04 3115.75,3477.38 3126.36,3487.99 3126.7,3486.35 3127.44,3484.47 3128.44,3482.67
  region net GND: 3159.54,3276.27 3152.47,3269.2 3151.06,3270.3 3149.27,3271.3 3147.39,3272.04 3145.75,3272.38 3156.36,3282.99 3156.7,3281.35 3157.44,3279.47 3158.44,3277.67
  region net GPIO0: 3221.38,3308.75 3211.38,3308.75 3211.16,3310.52 3210.6,3312.5 3209.8,3314.35 3208.88,3315.75 3223.88,3315.75 3222.96,3314.35 3222.16,3312.5 3221.59,3310.52